# Altium PCB MCU_PcbDoc.PcbDoc
Units mil, origin at the board's own origin, x right, y up, seen from the top; angles counter-clockwise.
Board outline 1575 x 2520 mil, 2 copper layers (Top Layer, Bottom Layer); 3 components, 19 nets, 72 pads, 14 vias.
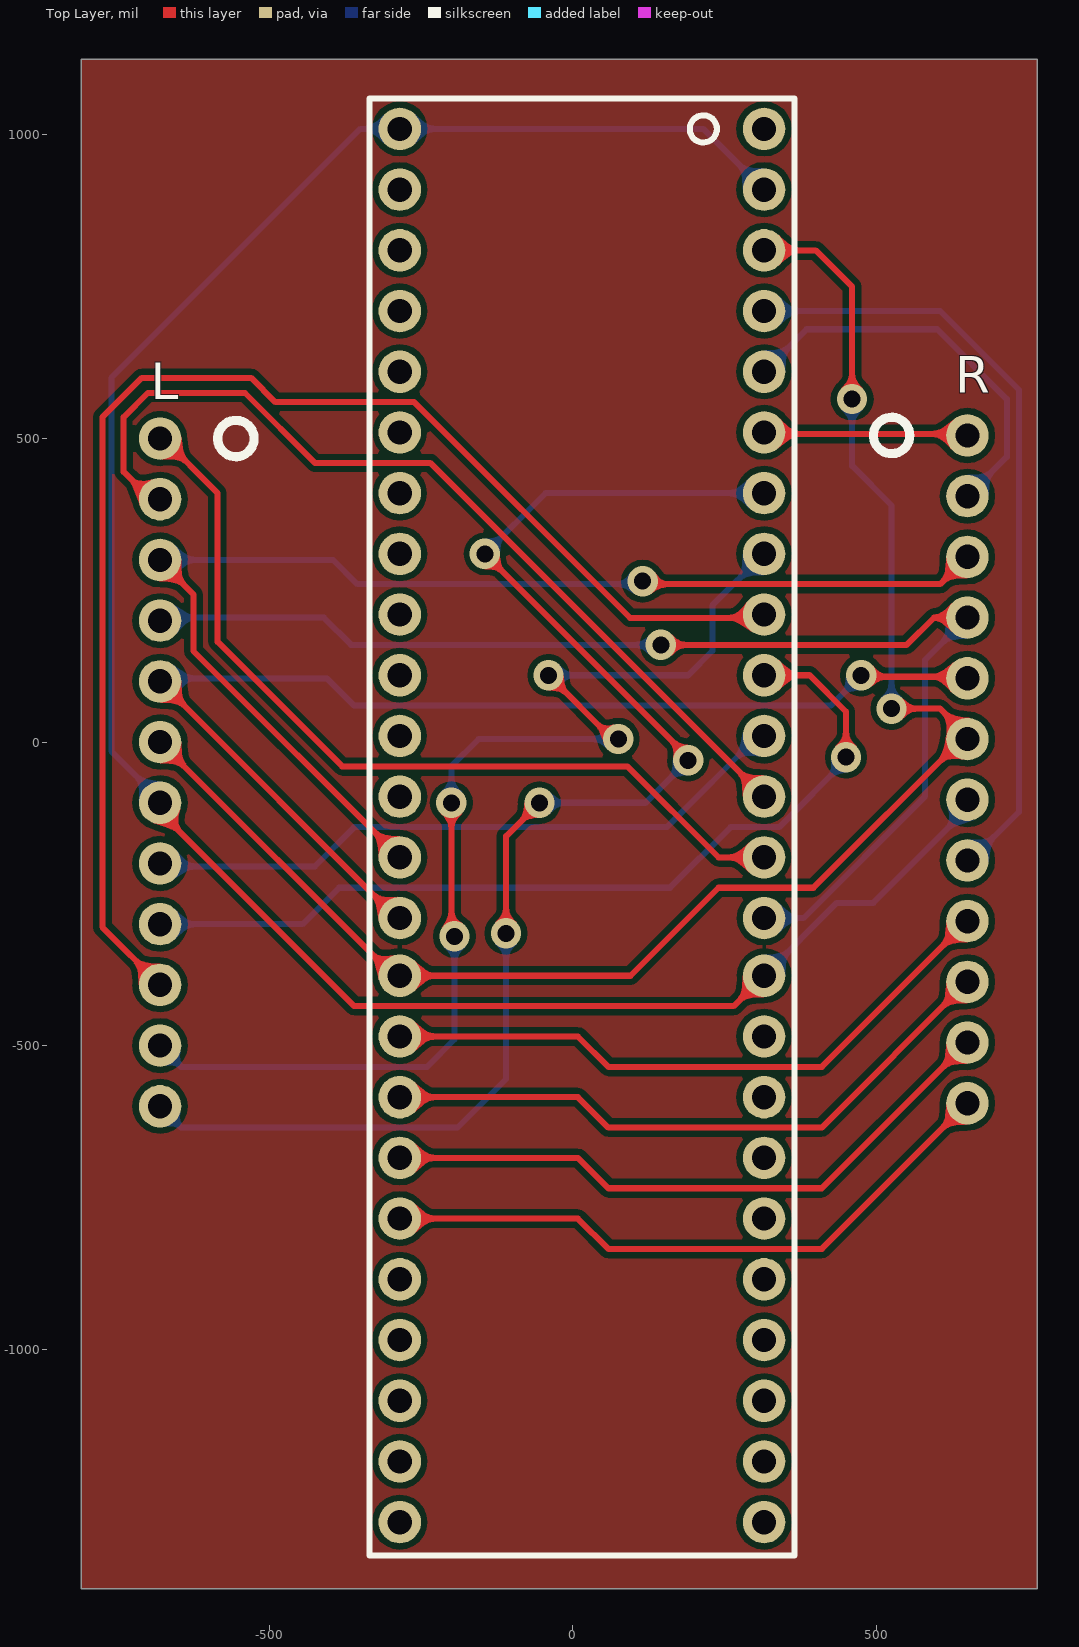
[diagram p0: Top Layer view]
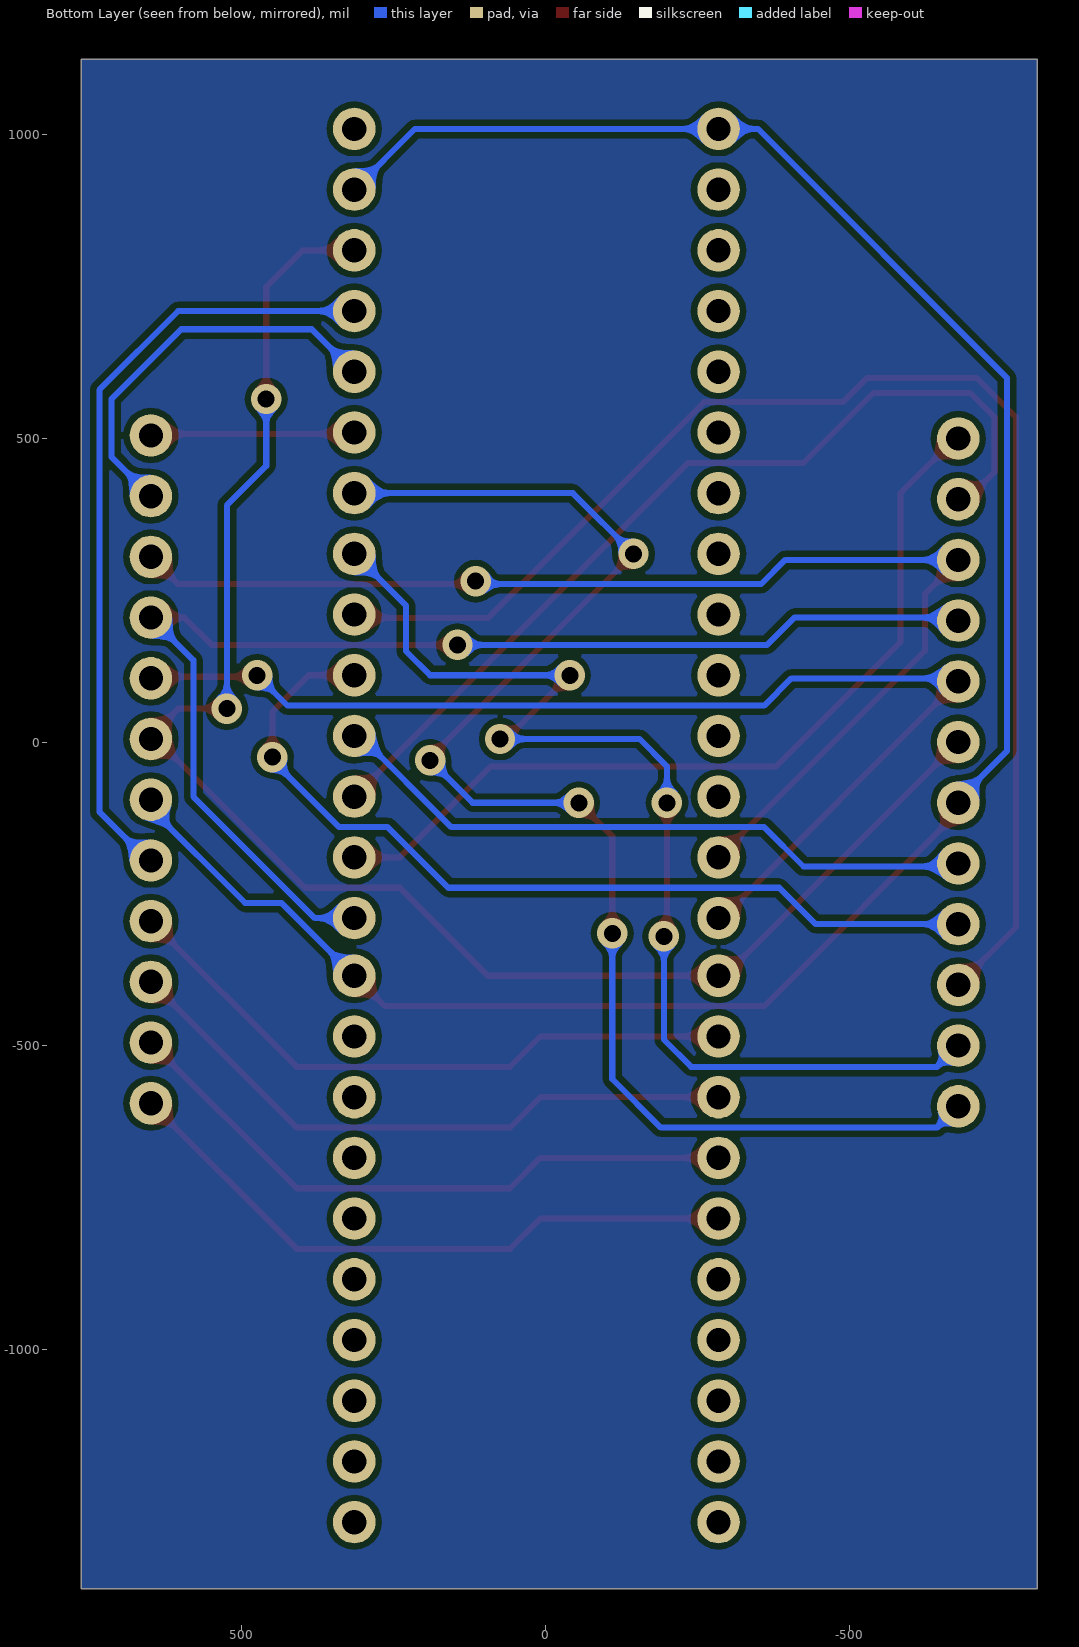
[diagram p1: Bottom Layer view, seen from below]

## Layer stack, top to bottom
Top Solder: solder mask 0.4, Solder Resist, Dk 3.5
Top Layer: signal copper 1.4
Dielectric 1: dielectric 12.6, FR-4, Dk 4.8
Bottom Layer: signal copper 1.4
Bottom Solder: solder mask 0.4, Solder Resist, Dk 3.5

## Board outline
-810,5 -810,1125 765,1125 765,-1395 -810,-1395
cut-out: -810,1100

## Design rules (kind name [scope] priority, off if disabled: settings)
Clearance [All] p1: gap=10 ignorepadtopadclearanceinfootprint=FALSE except(0: Arc-Hole Track-Hole SMDPad-Hole THPad-Hole Via-Hole Fill-Hole Poly-Hole Region-Hole Text-Hole)
PolygonConnect [All] p1: connectstyle=Relief reliefconductorwidth=10 reliefentries=4 polygonreliefangle="90 Angle" airgapwidth=10
RoutingVias [All] p1: holewidth=28 width=50 viastyle="Through Hole" minholewidth=28 minwidth=50 maxholewidth=28 maxwidth=50
SolderMaskExpansion [All] p1: expansion=4 istentingtop=FALSE
Width [All] p1: maxlimit=10 minlimit=10 preferedwidth=10
30 further rules are at their usual default settings.

## Classes and differential pairs
component class MCU_Teensy: L R

## Components (designator, comment, footprint, x,y, rotation, side; value= is the part's Value field where it differs from the comment)
L "PIN_left" ? -680,0 r0 top (schematic designator CON_L_1)
R "PIN_right" PIN_RIGHT 650,5 r0 top (schematic designator CON_R_1)
? "Teensy" Teensy 15,-140 r0 top

## Footprints (in the part's own frame and the unit in brackets; to place one, negate y for a bottom-side part, rotate by r counter-clockwise, add the part's x,y. Pads: shape width x height; smd on the part's side, far side on the other; paste and mask are expansions set on the pad)
PIN_RIGHT [mil]
  round 70 hole 40: 1(0,500) 2(0,400) 3(0,300) 4(0,200) 5(0,100) 6(0,0) 7(0,-100) 8(0,-200) 9(0,-300) 10(0,-400) 11(0,-500) 12(0,-600)
  silkscreen extent -155,470 -95,530
Teensy [mil]
  round 70 hole 40: 1(300,1150) 2(300,1050) 3(300,950) 4(300,850) 5(300,750) 6(300,650) 7(300,550) 8(300,450) 9(300,350) 10(300,250) 11(300,150) 12(300,50) 13(300,-50) 14(300,-150) 15(300,-245) 16(300,-345) 17(300,-445) 18(300,-545) 19(300,-645) 20(300,-745) 21(300,-845) 22(300,-945) 23(300,-1045) 24(300,-1145) 25(-300,1150) 26(-300,1050) 27(-300,950) 28(-300,850) 29(-300,750) 30(-300,650) 31(-300,550) 32(-300,450) 33(-300,350) 34(-300,250) 35(-300,150) 36(-300,50) 37(-300,-50) 38(-300,-150) 39(-300,-245) 40(-300,-345) 41(-300,-445) 42(-300,-545) 43(-300,-645) 44(-300,-745) 45(-300,-845) 46(-300,-945) 47(-300,-1045) 48(-300,-1145)
  silkscreen extent -350,-1200 350,1200
? [mil]
  round 70 hole 40: 1(0,500) 2(0,400) 3(0,300) 4(0,200) 5(0,100) 6(0,0) 7(0,-100) 8(0,-200) 9(0,-300) 10(0,-400) 11(0,-500) 12(0,-600)
  silkscreen extent 95,470 155,530

## Part data
?: "IC"

## Via types
v1: diameter 50, hole 28, Top Layer to Bottom Layer, 14 vias

## Nets (pads, with @x,y where several pads share a name; then routed paths per layer and width w, separated by ;. In a path a pad name is that pad's centre, name@x,y a point inside that pad or via, vN(x,y) a via of type N, cw(c..) or ccw(c..) an arc to the next point about the centre after c; other vN are vias at no path point)
GND: ?.2 ?.15 ?.25 L.7 R.7 | length 3642.2
  Top Layer w10: L.7@-687.5,-107.5 -360,-435 265,-435 ?.15
  Bottom Layer w10: L.7 -680,-95 -760,-15 -760,600 -350,1010 ?.25 215,1010 ?.2 ; ?.15 435,-265 495,-265 650,-110 R.7
Net_4: ?.4 R.8 | length 1287
  Bottom Layer w10: ?.4 605,710 735,580 735,-115 655,-195 R.8
Net_5: ?.5 R.2 | length 663.6
  Bottom Layer w10: ?.5 385,680 600,680 715,565 715,470 R.2
Net_6: ?.6 R.1 | length 337.1
  Top Layer w10: ?.6 317.5,507.5 647.5,507.5 R.1
Net_7: ?.7 L.12 | length 2349.6
  Top Layer w10: v1(-145,310) 190,-25 v1(190,-30) ; v1(-110,-315) -110,-155 v1(-55,-100)
  Bottom Layer w10: L.12 -645,-635 -190,-635 -110,-555 v1(-110,-315) ; v1(-145,310) -45,410 ?.7 ; v1(-55,-100) 120,-100 v1(190,-30)
Net_8: ?.8 L.11 | length 1904.1
  Top Layer w10: v1(-200,-100) -200,-315 v1(-195,-320) ; v1(-40,110) 65,5 v1(75,5)
  Bottom Layer w10: L.11 -645,-535 -240,-535 -195,-490 v1(-195,-320) ; v1(-200,-100) -200,-40 -155,5 v1(75,5) ; v1(-40,110) 190,110 230,150 230,225 ?.8
Net_9: ?.9 L.10 | length 2257.3
  Top Layer w10: L.10 -775,-305 -775,535 -710,600 -530,600 -490,560 -261.26,560 94.15,204.58 309.58,204.58 ?.9
Net_10: ?.10 L.9 | length 1480.2
  Top Layer w10: ?.10 390,110 450,50 v1(450,-25)
  Bottom Layer w10: L.9 -445,-300 -385,-240 160,-240 260,-140 340,-140 v1@452.5,-27.5
Net_11: ?.11 L.8 | length 1086.1
  Bottom Layer w10: L.8 -675,-205 -425,-205 -360,-140 155,-140 305,10 ?.11
Net_12: ?.12 L.2 | length 1493.6
  Top Layer w10: L.2@-700,405 -740,445 -740,535 -700,575 -540,575 -425,460 -235,460 ?.12
Net_13: ?.13 L.1 | length 1424.3
  Top Layer w10: L.1 -675,500 -587.93,412.93 -585,410 -585,165 -380,-40 90,-40 240,-190 ?.13
Net_14: ?.14 L.4 R.4 | length 2041.2
  Top Layer w10: v1(145,160) 550,160 595,205 R.4
  Bottom Layer w10: L.4 -675,205 -410,205 -365,160 v1(145,160) ; ?.14 380,-290 580,-90 580,135 R.4
Net_37: ?.37 L.3 R.3 | length 2023
  Top Layer w10: L.3 -680,298.26 -625,243.26 -625,150 ?.37 ; v1(115,265) 120,260 605,260 R.3
  Bottom Layer w10: L.3 -395,300 -355,260 110,260 v1(115,265)
Net_38: ?.38 L.5 R.5 | length 1930
  Top Layer w10: L.5 -290,-290 ?.38 ; v1(475,110) 477.5,107.5 647.5,107.5 R.5
  Bottom Layer w10: L.5 -675,105 -405,105 -360,60 425,60 v1(475,110)
Net_40: ?.40 R.9 | length 1055.1
  Top Layer w10: ?.40 8.47,-485 58.47,-535 410,-535 R.9
Net_41: ?.41 R.10 | length 1055.1
  Top Layer w10: ?.41 8.47,-585 58.47,-635 410,-635 R.10
Net_42: ?.42 R.11 | length 1055.1
  Top Layer w10: ?.42 8.47,-685 58.47,-735 410,-735 R.11
Net_43: ?.43 R.12 | length 1055.1
  Top Layer w10: ?.43 8.47,-785 58.47,-835 410,-835 R.12
VCC: ?.3 ?.39 L.6 R.6 | length 2686.4
  Top Layer w10: L.6 -295,-385 95,-385 240,-240 396.24,-240 641.24,5 R.6@645,5 ; ?.3 400,810 460,750 v1(460,565) ; v1(525,55) 605,55 650,10 R.6
  Bottom Layer w10: v1(460,565) 460,455 525,390 v1(525,55)
pads on no net: ?.1 ?.16 ?.17 ?.18 ?.19 ?.20 ?.21 ?.22 ?.23 ?.24 ?.26 ?.27 ?.28 ?.29 ?.30 ?.31 ?.32 ?.33 ?.34 ?.35 ?.36 ?.44 ?.45 ?.46 ?.47 ?.48

## Polygon pours and split planes (outlines as drawn)
no net on Mechanical 1 "NONET_L-01_P-001" (solid): -810,1100
no net on Bottom Layer "NONET_L02_P009" (solid, pour order 9): -810,1125 -810,-1395 765,-1395 765,1125
no net on Bottom Layer "NONET_L02_P004" (solid, pour order 4): -810,1100
no net on Top Layer "NONET_L01_P010" (solid, pour order 10): -810,1125 -810,-1395 765,-1395 765,1125

## Silkscreen, mask and mechanical layers (free items; w line width, h text height)
Mechanical 1:
  the board outline again, w10